# Altium PCB main.PcbDoc
Units mm, origin at the board's own origin, x right, y up, seen from the top; angles counter-clockwise.
Board outline 43.16 x 17.78 mm, 2 copper layers (Top Layer, Bottom Layer); 26 components, 45 nets, 159 pads, 0 vias.
Unrouted connection lines stored in the file: 92.
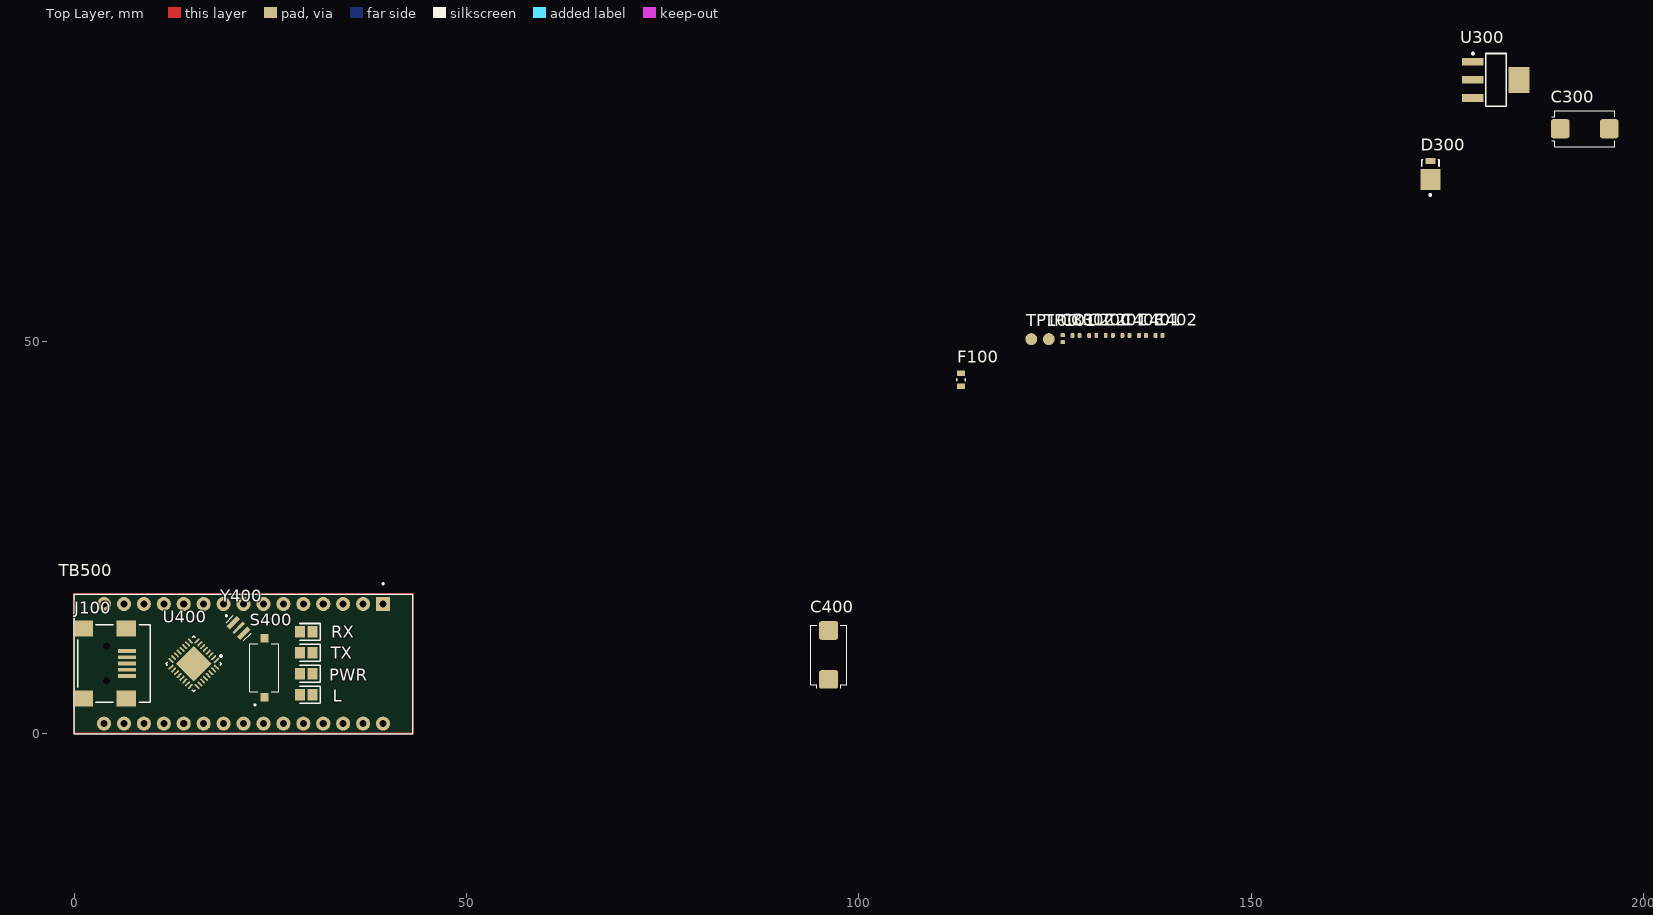
[diagram p0: Top Layer view]
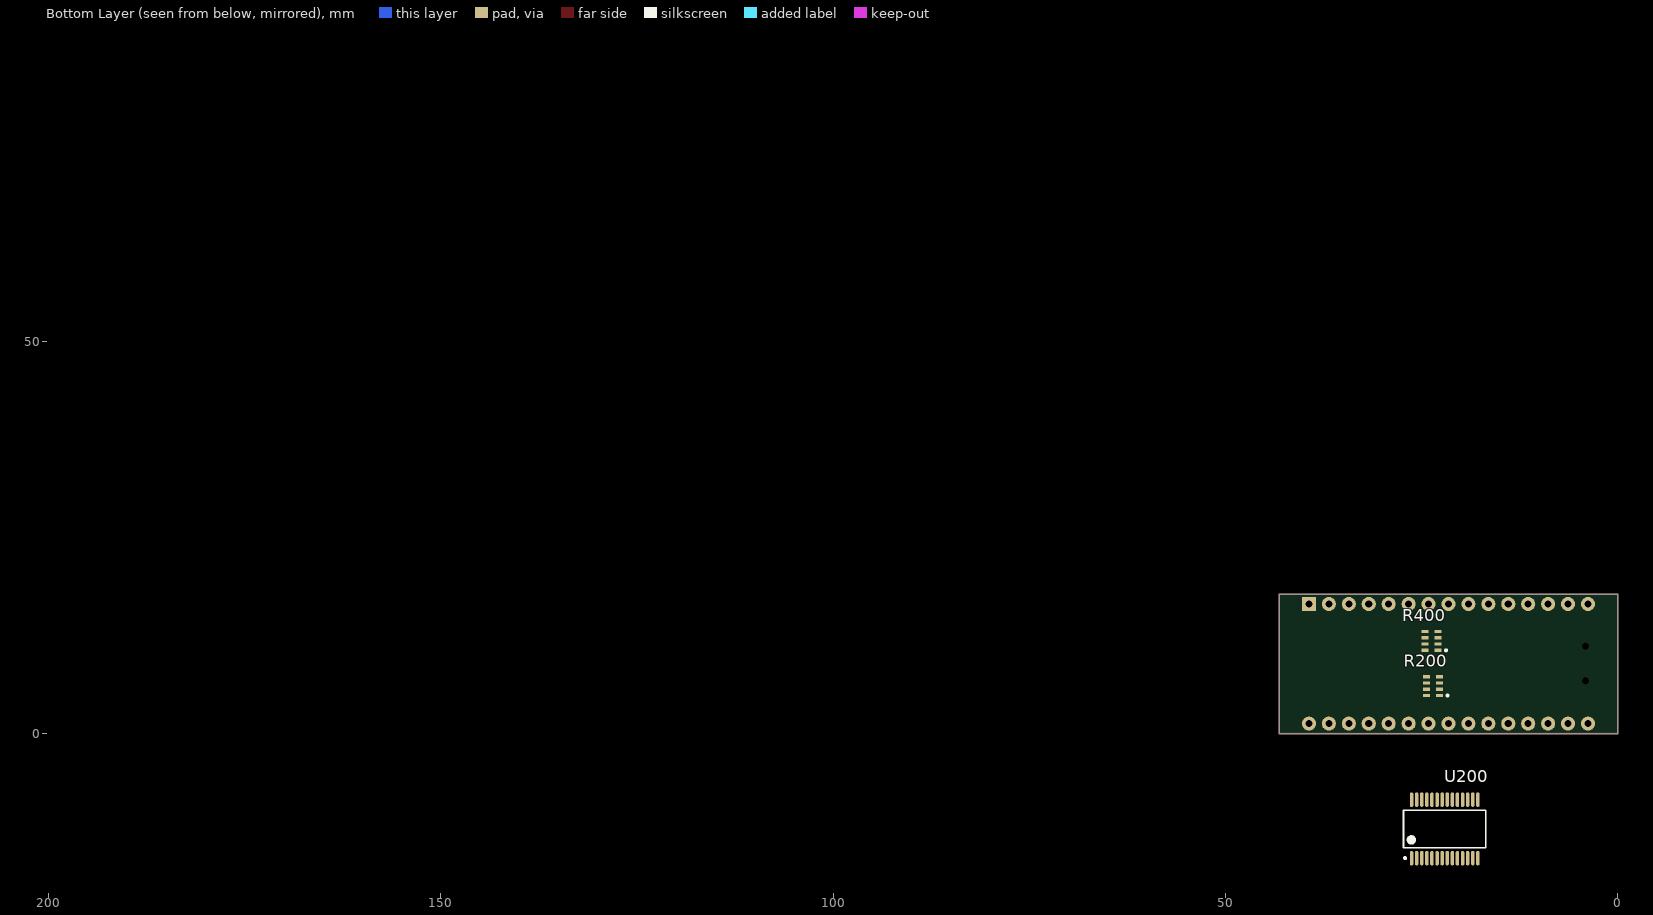
[diagram p1: Bottom Layer view, seen from below]

## Layer stack, top to bottom
Top Solder: solder mask 0.0102, Solder Resist, Dk 3.5
Top Layer: signal copper 0.0356
Dielectric 1: dielectric 0.32, FR-4, Dk 4.8
Bottom Layer: signal copper 0.0356
Bottom Solder: solder mask 0.0102, Solder Resist, Dk 3.5

## Board outline
0,0 0,17.78 43.16,17.78 43.16,0

## Design rules (kind name [scope] priority, off if disabled: settings)
Clearance [All] p1: gap=0.254 ignorepadtopadclearanceinfootprint=FALSE except(0: Arc-Hole Track-Hole SMDPad-Hole THPad-Hole Via-Hole Fill-Hole Poly-Hole Region-Hole Text-Hole)
PolygonConnect [All] p1: connectstyle=Relief reliefconductorwidth=0.254 reliefentries=4 polygonreliefangle="90 Angle" airgapwidth=0.254
RoutingVias [All] p1: holewidth=0.711 width=1.27 viastyle="Through Hole" minholewidth=0.711 minwidth=1.27 maxholewidth=0.711 maxwidth=1.27
SolderMaskExpansion [All] p1: expansion=0.102 istentingtop=FALSE
Width [All] p1: maxlimit=0.254 minlimit=0.254 preferedwidth=0.254
30 further rules are at their usual default settings.

## Classes and differential pairs
component class Power: C300 C301 C302 D3 D4 D300 PWR U2 U300
component class EXPENSION: TB500
component class ATMEGA328P: C400 C401 C402 C403 DS2 DS400 L R400 S1 S400 U3 U4 U400 Y400
component class Uart: C200 C201 R200 RX TX U200
component class USB_port: F100 J100 TP100 TP101

## Components (designator, comment, footprint, x,y, rotation, side; value= is the part's Value field where it differs from the comment)
C200 "0.1uF" CAPC1005X55N 129.808,50.73 r0 top
C201 "0.1uF" CAPC1005X55N 131.919,50.73 r0 top
C300 "47uF" CAPMP7343X430N 192.532,77.089 r0 top
C301 "0.1uF" CAPC1005X55N 125.986,50.33 r90 top
C302 "0.1uF" CAPC1005X55N 127.697,50.73 r0 top
C400 "47uF" CAPMP7343X430N 96.139,10.033 r90 top
C401 "0.1uF" CAPC1005X55N 136.142,50.73 r0 top
C402 "0.1uF" CAPC1005X55N 138.253,50.73 r0 top
C403 "0.1uF" CAPC1005X55N 134.03,50.73 r0 top
D300 "SS2P4-M3/84A" FP-96547-MFG 172.847,71.31 r90 top
F100 "MF-FSMF050X-2" FP-MF-FSMF-MFG 113.03,45.085 r90 top value=0.1-0.8Ω
J100 "1734035-2" TECO-1734035-2-5_V 6.731,8.928 r270 top
L "KPT-2012YC" LEDC2012X75N 29.591,4.953 r180 top
PWR "KPT-2012YC" LEDC2012X75N 29.591,7.62 r180 top
R200 "CAY16-102J4LF" BOUR-CAY16-J4_V 23.568,6.045 r0 bottom
R400 "CAY16-102J4LF" BOUR-CAY16-J4_V 23.749,11.811 r0 bottom
RX "KPT-2012YC" LEDC2012X75N 29.591,12.954 r180 top
S400 "TS09-63-25-WT-160-SMT-TR" SW_TS09-63-25-WT-160-SMT-TR 24.257,8.382 r90 top
TB500 "ARDUINO_NANO" SHIELD_ARDUINO_NANO 21.59,8.89 r270 top locked
TP100 "TP" TEST_POINT 121.977,50.268 r90 top
TP101 "TP" TEST_POINT 124.212,50.268 r90 top
TX "KPT-2012YC" LEDC2012X75N 29.591,10.287 r180 top
U200 "FT232RL" FTDI-SSOP-28_M 22.072,-12.15 r90 bottom
U300 "LM1117IMPX-5.0/NOPB" MP04A_M 181.2,83.312 r0 top
U400 "ATMEGA328P-MUR" FP-32M1-A-IPC_C 15.24,8.89 r225 top
Y400 "CSTCE16M0V53-R0" OSC_CSTCE16M0V53-R0 20.955,13.462 r315 top

## Footprints (in the part's own frame and the unit in brackets; to place one, negate y for a bottom-side part, rotate by r counter-clockwise, add the part's x,y. Pads: shape width x height; smd on the part's side, far side on the other; paste and mask are expansions set on the pad)
BOUR-CAY16-J4_V [mm] "SMD, 8-Leads, Body 1.6x3.2mm, Pitch 0.8mm"
  rect 0.9x0.425 smd: 1(-0.85,1.2) 2(-0.85,0.4) 3(-0.85,-0.4) 4(-0.85,-1.2) 5(0.85,-1.2) 6(0.85,-0.4) 7(0.85,0.4) 8(0.85,1.2)
  silkscreen extent -1.97,1.08 -1.72,1.32, body extent -0.8,-1.6 0.8,1.6, height 0.6
CAPC1005X55N [mm] "CAP 0402 NOMINAL"
  rrect50% 0.5x0.6 smd paste+0: 1(-0.45,0) 2(0.45,0)
  body extent -0.53,-0.28 0.52,0.28, height 0.5
CAPMP7343X430N [mm]
  rrect25% 2.37x2.43 smd: 1(-3.133,-0.013) 2(3.107,-0.013)
  silkscreen extent -4.25,-2.31 3.79,2.29, body extent -3.7,-2.22 3.7,2.23, height 3.01
FP-32M1-A-IPC_C [mm]
  rect 0.81x0.239 smd paste+0 mask+0: 1(-2.351,1.75)
  rrect100% 0.81x0.239 smd paste+0 mask+0: 2(-2.351,1.25) 3(-2.351,0.75) 4(-2.351,0.25) 5(-2.351,-0.25) 6(-2.351,-0.75) 7(-2.351,-1.25) 8(-2.351,-1.75) 17(2.351,-1.75) 18(2.351,-1.25) 19(2.351,-0.75) 20(2.351,-0.25) 21(2.351,0.25) 22(2.351,0.75) 23(2.351,1.25) 24(2.351,1.75)
  rrect100% 0.239x0.81 smd paste+0 mask+0: 9(-1.75,-2.351) 10(-1.25,-2.351) 11(-0.75,-2.351) 12(-0.25,-2.351) 13(0.25,-2.351) 14(0.75,-2.351) 15(1.25,-2.351) 16(1.75,-2.351) 25(1.75,2.351) 26(1.25,2.351) 27(0.75,2.351) 28(0.25,2.351) 29(-0.25,2.351) 30(-0.75,2.351) 31(-1.25,2.351) 32(-1.75,2.351)
  rect 3.25x3.25 smd paste-1000 mask+0: 33(0,0)
  silkscreen extent -3.28,-2.5 2.5,2.5, body extent -2.86,-2.86 2.86,2.86, height 0.25
FP-96547-MFG [mil]
  rect 105.12x100 smd paste+0 mask+0: 1(-27.5,0)
  rect 30x50 smd paste+0 mask+0: 2(65.06,0)
  silkscreen extent -110,-43 71,43, body extent -84,-54 84,54, height 10
FP-MF-FSMF-MFG [mm]
  rect 0.7x1 smd paste+0 mask+0: 1(-0.85,0) 2(0.85,0)
  silkscreen extent -0.13,-0.53 0.13,0.53, body extent -1.3,-0.63 1.3,0.63, height 0.25
FTDI-SSOP-28_M [mm] "SOP, 28-Leads, Body 10.5x5.6mm, Pitch 0.65mm, IPC Low Density"
  oval 1.85x0.45 smd: 1(-3.725,4.225) 2(-3.725,3.575) 3(-3.725,2.925) 4(-3.725,2.275) 5(-3.725,1.625) 6(-3.725,0.975) 7(-3.725,0.325) 8(-3.725,-0.325) 9(-3.725,-0.975) 10(-3.725,-1.625) 11(-3.725,-2.275) 12(-3.725,-2.925) 13(-3.725,-3.575) 14(-3.725,-4.225) 15(3.725,-4.225) 16(3.725,-3.575) 17(3.725,-2.925) 18(3.725,-2.275) 19(3.725,-1.625) 20(3.725,-0.975) 21(3.725,-0.325) 22(3.725,0.325) 23(3.725,0.975) 24(3.725,1.625) 25(3.725,2.275) 26(3.725,2.925) 27(3.725,3.575) 28(3.725,4.225)
  silkscreen extent -3.85,-5.25 2.4,5.25, body extent -3.9,-5.25 3.9,5.25, height 2
LEDC2012X75N [mm]
  rect 1.25x1.45 smd: 1(-0.8,0) 2(0.8,0)
  silkscreen extent -1.78,-1.07 0.8,1.07
MP04A_M [mm] "SOT223, 4-Leads, Body 6.5x3.5mm, Pitch 2.3mm, Lead Span 7mm, IPC Low Density"
  rect 2.7x1 smd: 1(-2.95,2.3) 2(-2.95,0) 3(-2.95,-2.3)
  rect 2.7x3.3 smd: 4(2.95,0)
  silkscreen extent -3.07,-3.35 1.3,3.47, body extent -1.86,-3.35 1.86,3.35, height 1.8
OSC_CSTCE16M0V53-R0 [mm]
  rect 0.6x1.9 smd: 1(-0.95,0) 3(0.95,0)
  rect 0.4x1.9 smd: 2(0,0)
  silkscreen extent -2.3,-0.65 1.6,0.65, body extent -1.6,-0.65 1.6,0.65, height 1
SHIELD_ARDUINO_NANO [mm]
  rect 1.8x1.8 / inner round 1.8 / far side rect 1.8x1.8 hole 0.9: 1(-7.62,17.78)
  round 1.8 hole 0.9: 2(-7.62,15.24) 3(-7.62,12.7) 4(-7.62,10.16) 5(-7.62,7.62) 6(-7.62,5.08) 7(-7.62,2.54) 8(-7.62,0) 9(-7.62,-2.54) 10(-7.62,-5.08) 11(-7.62,-7.62) 12(-7.62,-10.16) 13(-7.62,-12.7) 14(-7.62,-15.24) 15(-7.62,-17.78) 16(7.62,-17.78) 17(7.62,-15.24) 18(7.62,-12.7) 19(7.62,-10.16) 20(7.62,-7.62) 21(7.62,-5.08) 22(7.62,-2.54) 23(7.62,0) 24(7.62,2.54) 25(7.62,5.08) 26(7.62,7.62) 27(7.62,10.16) 28(7.62,12.7) 29(7.62,15.24) 30(7.62,17.78)
  silkscreen extent -10.3,-21.59 8.89,21.59
SW_TS09-63-25-WT-160-SMT-TR [mm]
  rect 1.1x1 smd: 1(-3.75,0) 2(3.75,0)
  silkscreen extent -4.82,-1.85 3.05,1.85
TECO-1734035-2-5_V [mm] "SMD, 5-Leads, Body 9.9x9.2mm, Pitch 0.8mm"
  rect 0.5x2.3 smd: 1(-1.6,0) 2(-0.8,0) 3(0,0) 4(0.8,0) 5(1.6,0)
  rect 2x2.5 smd: 6(-4.45,-0.1) 7(4.45,-0.1) 8(-4.45,-5.6) 9(4.45,-5.6)
  round 0.6 hole 0.9 unplated: 10(-2.2,-2.6) 11(2.2,-2.6)
  silkscreen extent -4.95,-6.25 4.95,2.95, body extent -4.95,-6.25 4.95,2.95, height 4.09
TEST_POINT [mil]
  round 60 smd: 1(0,0)

## Part data
C200 C201 C301 C302 C401 C402 C403: library part 30041, "CAP CER 0.1uF ±10% 50V X7R 0603 (1608 Metric)", Dielectric=X7R, Manufacturer=KEMET, Manufacturer Part Number=C0603C104K5RECAUTO, Package_Case="0603 (1608 Metric)", Sorted_Value=1E-7, Supplier Part Number 1=399-14105-2-ND, Temperature Range="-55C to +125C", Tolerance=±10%, Voltage_Rating=50V, ComponentLink1Description=Datasheet, ComponentLink2Description="Supplier Part Details", ComponentLink2URL=https://www.digikey.com/products/en?keywords=C0603C104K5RECAUTO, Created By=randy, Created_Date="2024-03-31 22:55:42", ID=30041, Manufacturer Part Description="CAP CER 0.1uF ±10% 50V X7R 0603 (1608 Metric)", Part_Status=New, Part_Type=Capacitor, RoHS=Yes, Size / Dimension="0.063in L x 0.031in W (1.60mm x 0.80mm)", Sub_Type=CER, Supplier 1=DigiKey, Symbol Ref=CAP_NOPOL, Updated By=randy, Updated_Date="2024-03-31 22:57:36"
C300 C400: library part 30017, "CAP TANT 47uF ±20% 16V 2917 (7343 Metric)", Manufacturer=Panasonic, Manufacturer Part Number=16TQC47MW, Package_Case="2917 (7343 Metric)", Sorted_Value=4.7E-5, Supplier Part Number 1=P16487TR-ND, Temperature Range="-55C to +105C", Tolerance=±20%, Voltage_Rating=16V, ComponentLink1Description=Datasheet, ComponentLink1URL=https://industrial.panasonic.com/cdbs/www-data/pdf/AAA8000/AAA8000C62.pdf, ComponentLink2Description="Supplier Part Details", ComponentLink2URL=https://www.digikey.com/products/en?keywords=16TQC47MW, Created By=rclemmons, Created_Date="2014-12-11 21:29:30", Height - Seated (Max)="0.079in (2.00mm)", ID=30017, Manufacturer Part Description="CAP TANT 47uF ±20% 16V 2917 (7343 Metric)", Part_Status=Obsolete, Part_Type=Capacitor, RoHS=Yes, Size / Dimension="0.287in L x 0.169in W (7.30mm x 4.30mm)", Sub_Type=TANT, Supplier 1=DigiKey, Symbol Ref=CAP_POL, Updated By=rclemmons, Updated_Date="2024-02-04 20:00:42"
D300: library part CMP-02539-000061-1, "DIODE SCHOTTKY 40V 2A DO220AA", Average Rectified Current=2A, Case/Package=DO-220AA, Forward Voltage=550mV, Max Forward Surge Current (Ifsm)=50A, Max Operating Temperature=150°C, Max Repetitive Reverse Voltage (Vrrm)=40V, Max Reverse Current=150uA, Min Operating Temperature=-55°C, Package Quantity=3000, Contact Plating=Tin, Element Configuration=Single, Forward Current=2A, Height=1.15mm, Lead Free="Lead Free", Length=3.61mm, Max Reverse Voltage (DC)=40V, Max Surge Current=50A, Mount="Surface Mount", Number of Pins=2, Packaging="Tape and Reel", Peak Non-Repetitive Surge Current=50A, Radiation Hardening=No, RoHS Compliant=No, Series=eSMP®, Width=2.18mm
F100: library part CMP-07400-000010-1, "PTC RESET FUSE 6V 500MA 0603", Ambient Temperature Range High=+85°C, Ambient Temperature Range Low=-40°C, Current Rating=40A, Hold Current=0.5A, Manufacturer="Bourns Inc.", Package=MF-FSMF, Resistance=0.1-0.8Ω, Temperature="-40°C to +85°C", Trip Current=1A, Voltage Rating=6V, Automotive=No, Category=Fuse, ComponentLink2Description=Datasheet, ComponentLink2URL=https://www.bourns.com/docs/Product-Datasheets/mffsmf.pdf, Device Class L1="Circuit Protection", Device Class L2="PTC Resettable Fuses", Device Class L3=unset, Digikey Description="PTC RESET FUSE 6V 500MA 0603", Height=1mm, Lead Free=Yes, Manufacturer Part Number=MF-FSMF050X-2, Mouser Description="Resettable Fuses - PPTC 6volts 40amps", Octopart=https://octopart.com/mf-fsmf050x-2-bourns-10470804, RoHS=TRUE, Temperature Range High=+85°C, Temperature Range Low=-40°C, Trip Time=0.1s
J100: library part CMP-2000-05407-1, "Surface Mount Type B Mini USB, 5 Positions, 0.8 mm Pitch, 0 to 50 degC, RoHS, Tape and Reel", COLOR=Black, Manufacturer="TE Connectivity", Maximum Current Rating=N/A, Body Orientation=RightAngle, Contact Material=PhosphorBronze, Contact Plating=GoldOverNickel, Datasheet URL=https://datasheet.ciiva.com/11759/0900766b80ed62f8-11759638.pdf, Datasheet Version="Rev. B1, 07/2010", Dimension=4.14mm, Gender=RCP, Housing Material=Thermoplastic, Manufacturer URL=http://www.te.com/, Maximum Voltage Rating=N/A, Mounting=SurfaceMount, Number of Contacts=5, Number of Ports=1, Number of Terminals=5, Operating Temperature=N/A, Packaging=TapeandReel, Part No=1734035-2, Pitch=0.8mm, RoHS=Yes, Termination Method=Solder, Type=USB
L PWR: "Kingbright KPT-2012YC Yellow LED, 588 nm, 2012 (0805), Rectangle Lens SMD Package", Manufacturer_Name=Kingbright, Datasheet Link=https://componentsearchengine.com/Datasheets/2/KPT-2012YC.pdf, Geometry.Height=0.75mm, Manufacturer_Part_Number=KPT-2012YC
R200 R400: library part CMP-1747-00007-1, "Chip Resistor Array, 1 KOhm, +/- 5%, 62.5 mW, -55 to 125 degC, 8-Pin SMD, RoHS, Tape and Reel", Case Code (Imperial)=0603, Case Code (Metric)=1608, Max Operating Temperature="155 degC", Min Operating Temperature="-55 degC", Package Quantity=5000, Power Rating="100 mW", Resistance="330 Ohm", Tolerance=1%, Voltage Rating="50 V", Case\Package=0603, ComponentLink1Description="Manufacturer URL", ComponentLink1URL=http://www.bourns.com/, ComponentLink2Description=Datasheet, ComponentLink2URL=http://www.bourns.com/pdfs/CATCAY.pdf, DatasheetVersion=Sep-14, Height="0.45 mm", Length="1.6 mm", Mount="Surface Mount", PackageDescription="8-Pin Surface Mount Device, Body 1.6 x 3.2 mm, Pitch 0.8 mm", PackageReference=CAY16-J4, Packaging="Tape and Reel", Pins=2, REACH SVHC="No SVHC", RoHSCompliant=true, Voltage Rating (DC)="50 V", Width="0.8 mm"
RX: "Kingbright KPT-2012YC Yellow LED, 588 nm, 2012 (0805), Rectangle Lens SMD Package", COLOR=RED, Manufacturer_Name=Kingbright, Datasheet Link=https://componentsearchengine.com/Datasheets/2/KPT-2012YC.pdf, Geometry.Height=0.75mm, Manufacturer_Part_Number=KPT-2012YC
S400: Package=None, Availability=Unavailable, MP=TS09-63-25-WT-160-SMT-TR, Price=None
TB500: "Small, complete, and breadboard-friendly board based on the ATmega328 (Arduino Nano 3.x)", Package="Non-Standard Arduino", Availability="Not in stock", Check_prices=https://www.snapeda.com/parts/Arduino%20Nano/Arduino/view-part/?ref=eda, MF=Arduino, MP="Arduino Nano", Price=None, SnapEDA_Link=https://www.snapeda.com/parts/Arduino%20Nano/Arduino/view-part/?ref=snap
TP100 TP101: library part TEST_POINT
TX: "Kingbright KPT-2012YC Yellow LED, 588 nm, 2012 (0805), Rectangle Lens SMD Package", COLOR=GREEN, Manufacturer_Name=Kingbright, Datasheet Link=https://componentsearchengine.com/Datasheets/2/KPT-2012YC.pdf, Geometry.Height=0.75mm, Manufacturer_Part_Number=KPT-2012YC
U200: library part CMP-2000-05029-1, "IC USB FS SERIAL UART 28-SSOP", Manufacturer=FTDI, Maximum Operating Temperature=+85degC, Minimum Operating Temperature=-40degC, Package Type=SSOP, Datasheet URL=http://datasheet.octopart.com/FT232RL-FTDI-datasheet-120501.pdf, Datasheet Version="Rev. 1.04, 02/2006", Dimensions=10.2x5.3x1.75mm, Height=1.75mm, Length=10.2mm, Manufacturer URL=http://www.ftdichip.com/, Maximum Data Rate=3MBd, Mounting Type=SurfaceMount, Number of Channels per Chip=1, Pin Count=28, Receive FIFO=256B, Transmit FIFO=128B, Width=5.3mm
U300: library part CMP-0062-01628-3, "800mA Low-Dropout Linear Regulator, 4-pin SOT-223, Pb-Free", Manufacturer="National Semiconductor", PackageTopMarking=XYTT*N06B, PowerWise=N, Code_IPC=SOT223-4, Code_JEDEC=TO-261-AA, ComponentLink1Description="Manufacturer URL", ComponentLink1URL=http://www.national.com/, ComponentLink2Description="LM1117 Datasheet", ComponentLink2URL=http://www.national.com/ds/LM/LM1117.pdf, ComponentLink3Description="LM1117 Web Page", ComponentLink3URL=http://www.national.com/pf/LM/LM1117.html, ComponentLink4Description="MP04A Package Page", ComponentLink4URL=http://www.national.com/packaging/folders/mp04a.html, CompType="LDO IC", DatasheetVersion=Apr-2006, High-Reliability=Y, PackageDescription="Molded SOT-223, 6.50 x 3.56 x 1.6mm Body, 4 Lead, 2.3mm Pitch", PackageReference=MP04A, PackageVersion="revB, Apr-2003", PartNumber=LM1117IMPX-5.0/NOPB, PinCount=4, RevisionNote="SCH symbol layout adjusted", RoHS=Y
U400: library part CMP-06276-000062-1, "IC MCU 8BIT 32KB FLASH 32VQFN", Case/Package=VQFN, Frequency=20MHz, Max Operating Temperature=125°C, Min Operating Temperature=-40°C, Core Architecture=PIC, Interface=I2C, Memory Size=3.5KB, Memory Type=FLASH, Number of I/Os=24, Oscillator Type=Internal, Packaging=Rail/Tube, Peripherals="Brown-out Detect/Reset"
Y400: "16 MHz Ceramic Resonator Built in Capacitor 15 pF Â±0.3% -20Â°C ~ 80Â°C Surface Mount", Package="SMD-3 Murata", Availability="In Stock", Check_prices=https://www.snapeda.com/parts/CSTCE16M0V53-R0/Murata+Electronics+North+America/view-part/?ref=eda, MF=Murata, MP=CSTCE16M0V53-R0, Price=None, Purchase-URL=https://pricing.snapeda.com/search/part/CSTCE16M0V53-R0/?ref=eda, SnapEDA_Link=https://www.snapeda.com/parts/CSTCE16M0V53-R0/Murata+Electronics+North+America/view-part/?ref=snap

## Nets (pads, with @x,y where several pads share a name; then routed paths per layer and width w, separated by ;. In a path a pad name is that pad's centre, name@x,y a point inside that pad or via, vN(x,y) a via of type N, cw(c..) or ccw(c..) an arc to the next point about the centre after c; other vN are vias at no path point)
3V3: TB500.17
+3V3: C201.1 U200.17
AREF: C403.1 TB500.18 U400.20
GND: C201.2 C300.2 C301.2 C302.2 C400.2 C401.2 C402.2 C403.2 J100.5 J100.6 J100.7 J100.8 J100.9 L.1 PWR.1 S400.1 TB500.4 TB500.29 U200.7 U200.18 U200.21 U200.25 U200.26 U300.1 U400.3 U400.5 U400.21 Y400.2
NetC200_1: C200.1 U200.2
NetF100_2: F100.2 J100.1
PB0: TB500.11 U400.12
PB1: TB500.12 U400.13
PB2: TB500.13 U400.14
PB3: TB500.14 U400.15
PB4: TB500.15 U400.16
PB5: R200.1 TB500.16 U400.17
PB6: U400.7 Y400.1
PB7: U400.8 Y400.3
PC0: TB500.19 U400.23
PC1: TB500.20 U400.24
PC2: TB500.21 U400.25
PC3: TB500.22 U400.26
PC4: TB500.23 U400.27
PC5: TB500.24 U400.28
PC6: TB500.25 U400.19
PC7: TB500.26 U400.22
PD0: R400.1 TB500.1 U400.30
PD1: R400.2 TB500.2 U400.31
PD2: TB500.5 U400.32
PD3: TB500.6 U400.1
PD4: TB500.7 U400.2
PD5: TB500.8 U400.9
PD6: TB500.9 U400.10
PD7: TB500.10 U400.11
RESET: C200.2 R400.5 S400.2 TB500.3 TB500.28
RP1_2: R200.2 U200.23
RP1_4: R200.4 U200.22
RP1_5: R200.5 TX.2
RP1_7: R200.7 RX.2
RP1_8: L.2 R200.8
RP2_3: C302.1 C400.1 C401.1 C402.1 D300.1 R400.3 R400.4 RX.1 TB500.27 TX.1 U200.4 U200.20 U300.2 U300.4 U400.4 U400.6 U400.18
RP2_6: PWR.2 R400.6
RP2_7: R400.7 U200.5
RP2_8: R400.8 U200.1
USB_DN: J100.2 U200.16
USB_DP: J100.3 U200.15
VIN: TB500.30 U300.3
VUBUS: D300.2 F100.1
VUSUB: C300.1 C301.1
pads on no net: J100.4 J100.10 J100.11 R200.3 R200.6 TP100.1 TP101.1 U200.3 U200.6 U200.8 U200.9 U200.10 U200.11 U200.12 U200.13 U200.14 U200.19 U200.24 U200.27 U200.28 U400.29 U400.33
copper on no net: | length 121.9
  Top Layer w0.254: 0,0 43.16,0 43.16,17.78 0,17.78 0,0